# EAGLE board thermostat (EAGLE 7.6.0)
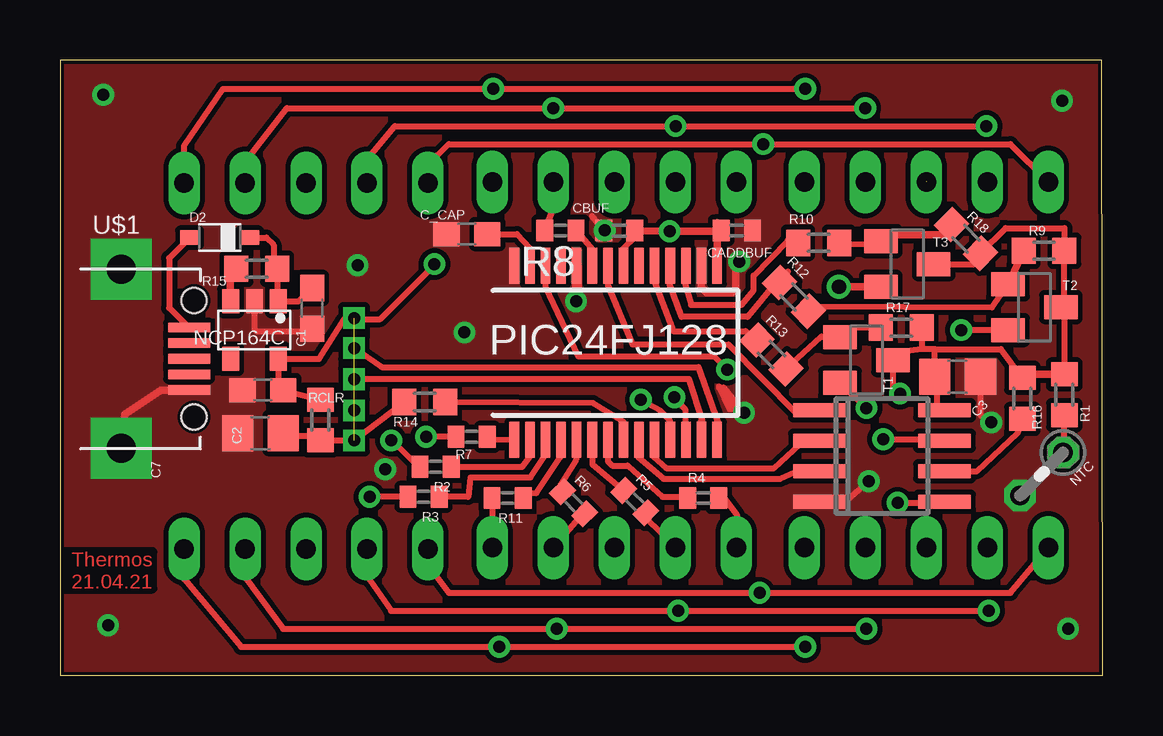
[diagram p0: board, top side]
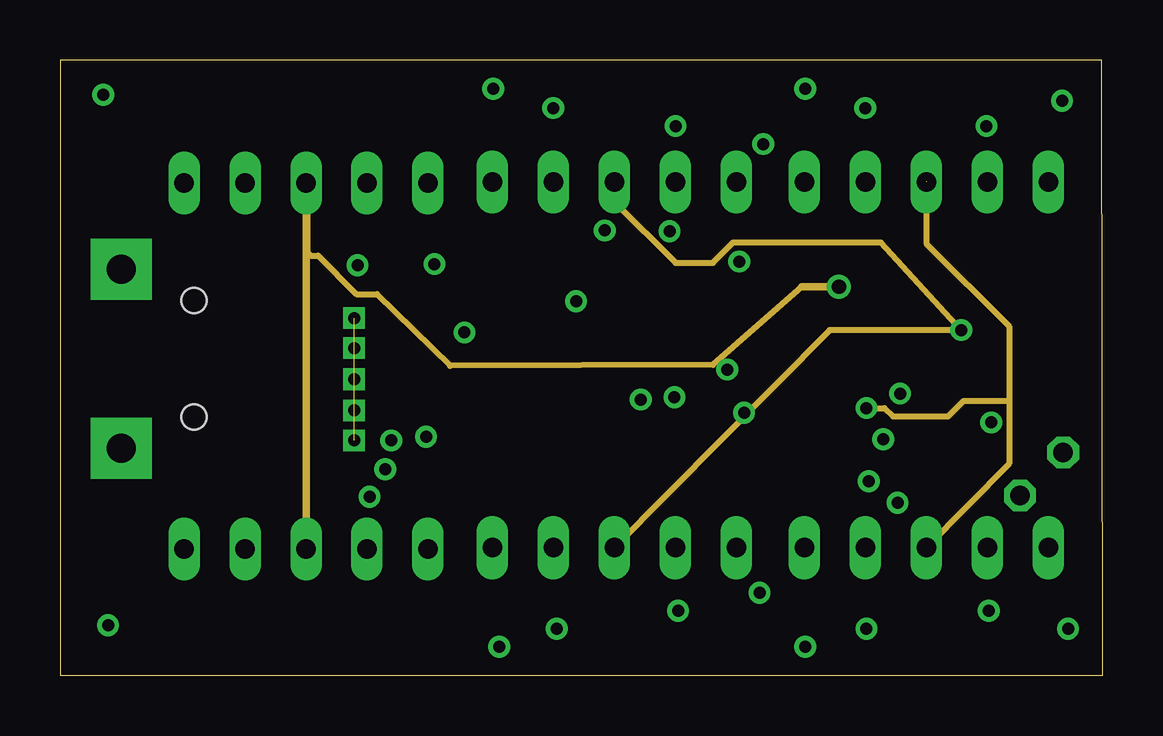
[diagram p1: board, inner layer Route2]
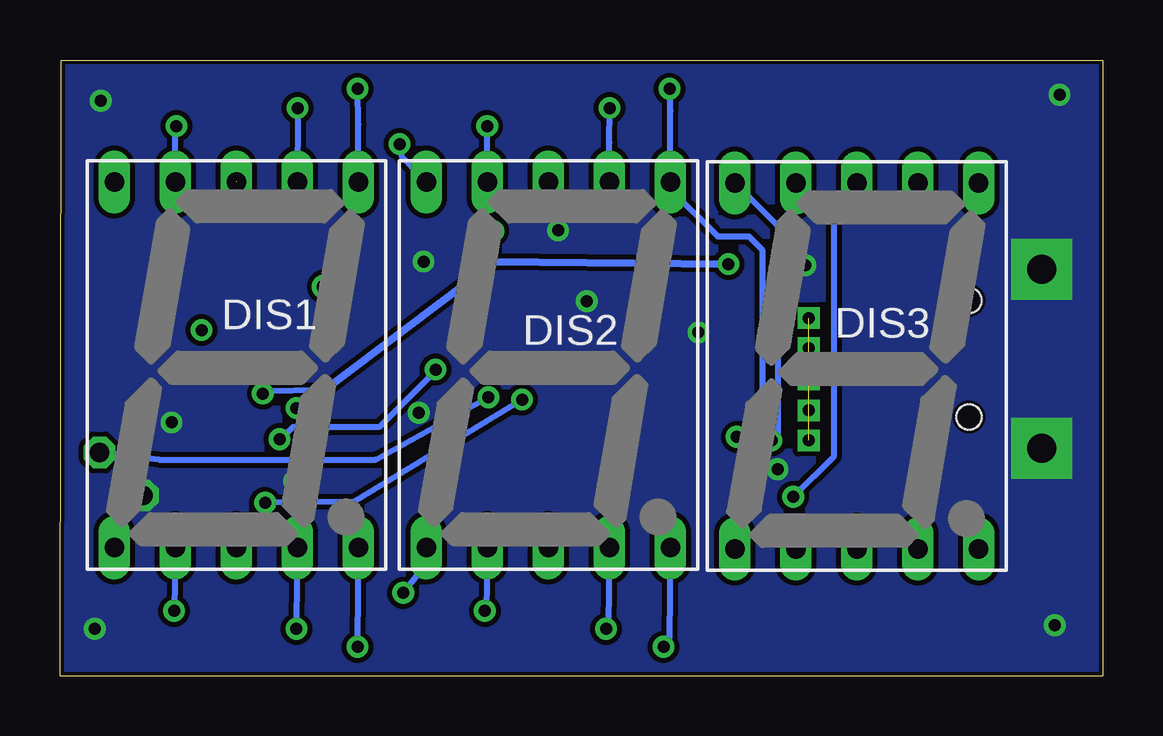
[diagram p2: board, bottom side, seen from below]

Size 43.45 x 25.65 mm. Coordinates in mm from the lower left corner, seen from the top.
Outline: 43.45,0 43.4,25.65 0,25.65 0,0 43.45,0
Copper layers (1+2*15+16): Top 0.035mm / dielectric 0.3mm / Route2 0.035mm / dielectric 0.3mm / Route15 0.035mm / dielectric 0.3mm / Bottom 0.035mm
Design rules "default *": minimum track width 10mil, minimum drill 24mil, track to track 8mil, track to pad 8mil, pad to pad 8mil, via to via 8mil, smd to smd 8mil, copper to edge 6mil, drill to drill 8mil, minimum pad ring 10mil, minimum via ring 8mil, stop-mask expansion 4mil, vias tented up to drill 0mil, thermal gap 10mil

## Footprints (pad centres in the part's own frame; a part is rotated, then mirrored left to right if it is on the bottom)
C0603 = smd 1.1 x 1: 1 -0.85,0; 2 0.85,0
C0805 = smd 1.3 x 1.5: 1 -0.95,0; 2 0.95,0
C0402 = smd 0.7 x 0.9: 1 -0.65,0; 2 0.65,0
SOD323_ST = smd 0.8 x 0.6: A 1.25,0; C -1.25,0
HDSP-M = drill 0.813 long: 1 -5.08,-7.62; 2 -2.54,-7.62; 3 0,-7.62; 4 2.54,-7.62; 5 5.08,-7.62; 6 5.08,7.62; 7 2.54,7.62; 8 0,7.62; 9 -2.54,7.62; 10 -5.08,7.62
TSOP-5 = smd 0.7 x 1: 1 -0.99,-1.2; 2 0,-1.2; 3 0.99,-1.2; 4 0.99,1.2; 5 -0.99,1.2
0204V = drill 0.813 octagon: 1 -1.27,0; 2 1.27,0
R0603 = smd 1 x 1.1: 1 -0.85,0; 2 0.85,0
R0402 = smd 0.7 x 0.9: 1 -0.65,0; 2 0.65,0
SOT23-BCE = smd 1 x 1.4: B -0.95,-1.1; C 0.95,-1.1; E 0,1.1
MICRO-USB = smd 0.4 x 1.75: 1 -1.3,4.525; 2 -0.65,4.525; 3 0,4.525; 4 0.65,4.525; 5 1.3,4.525 | drill 1.2 pad 2.54 square: GND1 -3.725,1.7; GND2 3.725,1.7 | hole 1.05: -2.425,4.73; 2.425,4.73
SSOP28 = smd 0.4 x 1.5: 1 -4.225,-3.625; 2 -3.575,-3.625; 3 -2.925,-3.625; 4 -2.275,-3.625; 5 -1.625,-3.625; 6 -0.975,-3.625; 7 -0.325,-3.625; 8 0.325,-3.625; 9 0.975,-3.625; 10 1.625,-3.625; 11 2.275,-3.625; 12 2.925,-3.625; 13 3.575,-3.625; 14 4.225,-3.625; 15 4.225,3.625; 16 3.575,3.625; 17 2.925,3.625; 18 2.275,3.625; 19 1.625,3.625; 20 0.975,3.625; 21 0.325,3.625; 22 -0.325,3.625; 23 -0.975,3.625; 24 -1.625,3.625; 25 -2.275,3.625; 26 -2.925,3.625; 27 -3.575,3.625; 28 -4.225,3.625
SO-08 = smd 0.6 x 2.2: 1 -1.905,-2.6; 2 -0.635,-2.6; 3 0.635,-2.6; 4 1.905,-2.6; 5 1.905,2.6; 6 0.635,2.6; 7 -0.635,2.6; 8 -1.905,2.6

## Placement (x,y rotation side)
C1  1u  [C0603]  10.5,15.3 270 top
C2  100n  [C0805]  8.35,10.1 180 top
C3  100n  [C0805]  37.4,12.45 180 top
C7  1u  [C0603]  8.45,11.9 180 top
C_CAP  100n  [C0603]  16.95,18.4 180 top
CADDBUF  100n  [C0402]  28.2,18.55 180 top
CBUF  100n  [C0402]  23.3,18.54 0 top
D2  BAT60J  [SOD323_ST]  6.65,18.25 180 top
DIS1  HD-H101  [HDSP-M]  36.1,12.95 0 bottom
DIS2  HD-H101  [HDSP-M]  23.1,12.95 0 bottom
DIS3  HD-H101  [HDSP-M]  10.25,12.9 0 bottom
NCP164C  -  [TSOP-5]  8.1,14.4 180 top
NTC  1k bei 25C  [0204V]  40.9,8.4 225 top
R1  1k  [R0603]  41.85,11.7 90 top
R2  47  [R0402]  15.65,8.7 180 top
R3  47  [R0402]  15.15,7.45 180 top
R4  47  [R0402]  26.8,7.4 0 top
R5  47  [R0402]  23.95,7.25 315 top
R6  47  [R0402]  21.4,7.2 315 top
R7  47  [R0402]  17.15,9.95 180 top
R8  47  [R0402]  20.85,18.55 180 top
R9  10k  [R0603]  41,17.7 0 top
R10  1k  [R0603]  31.61,18.03 0 top
R11  47  [R0402]  18.65,7.4 180 top
R12  1k  [R0603]  30.58,15.78 315 top
R13  1k  [R0603]  29.65,13.38 315 top
R14  100  [R0603]  15.2,11.4 0 top
R15  10k  [R0603]  8.2,16.95 0 top
R16  1k  [R0603]  40.1,11.55 90 top
R17  10k  [R0603]  35.05,14.5 0 top
R18  10k  [R0603]  37.75,18.2 315 top
RCLR  10k  [R0603]  10.85,10.65 90 top
T1  [SOT23-BCE]  33.6,13.15 270 top
T2  [SOT23-BCE]  40.6,15.35 270 top
T3  [SOT23-BCE]  35.3,17.15 270 top
U$1  MICRO-USB  [MICRO-USB]  0.85,13.2 270 top
U$2  -  [SSOP28]  23.15,13.45 0 top
U$3  MCP4141-103  [SO-08]  34.25,9.15 270 top

## Library data of the parts
C1 C7 C_CAP CADDBUF CBUF = eagle-ltspice; SPICEMODEL: NONE; SPICEPREFIX: C
C2 C3 R1 R9 R10 R12-R18 RCLR = rcl
D2 = diode
DIS1-DIS3 = display-hp; OC_FARNELL: unknown; OC_NEWARK: unknown
NCP164C = linear
NTC R2-R8 R11 = resistor
T1-T3 = transistor
U$1 = microusb
U$2 U$3 = microchip

## Nets
+3V3: C3.2 C7.1 CADDBUF.2 CBUF.2 NCP164C.5 R1.2 R9.2 R16.2 R17.2 R18.2 RCLR.2 T1.E T2.E T3.E U$2.15 U$2.21 U$3.8
+5V: C1.1 D2.C NCP164C.1 R15.2
_A: R8.1 U$2.23
_B: R7.1 U$2.1
_C: R6.1 U$2.5
_D: R5.1 U$2.6
_DP: R11.1 U$2.4
_E: R4.1 U$2.7
_F: R3.1 U$2.3
_G: R2.1 U$2.2
A: DIS1.7 DIS2.7 DIS3.7 R8.2
B: DIS1.6 DIS2.6 DIS3.6 R7.2
C: DIS1.4 DIS2.4 DIS3.4 R6.2
CS: U$2.22 U$3.1
D: DIS1.2 DIS2.2 DIS3.2 R5.2
DP: DIS1.5 DIS2.5 DIS3.5 R11.2
E: DIS1.1 DIS2.1 DIS3.1 R4.2
F: DIS1.9 DIS2.9 DIS3.9 R3.2
G: DIS1.10 DIS2.10 DIS3.10 R2.2
GND: C1.2 C2.2 C3.1 C7.2 C_CAP.2 CADDBUF.1 CBUF.1 NCP164C.2 NTC.2 U$1.5 U$1.GND1 U$1.GND2 U$2.16 U$2.24 U$2.28 U$3.4
IN1: U$2.11 U$3.5
IN2: NTC.1 R1.1 U$2.12
MCLR: C2.1 R14.1 RCLR.1
N$1: NCP164C.3 R15.1
N$3: R16.1 U$3.6
N$4: C_CAP.1 U$2.27
N$5: R13.2 R17.1 T1.B
N$6: D2.A U$1.1
N$8: R14.2 U$2.8
N$12: R10.2 R18.1 T3.B
N$14: R9.1 R12.2 T2.B
N$16: DIS1.3 DIS1.8 T1.C
N$17: DIS2.3 DIS2.8 T2.C
N$18: DIS3.3 DIS3.8 T3.C
PGC: U$2.13
PGD: U$2.14
S1: R13.1 U$2.19
S2: R12.1 U$2.18
S3: R10.1 U$2.17
SCK: U$2.10 U$3.2
SDI: U$2.9 U$3.3
SDO: U$2.26 U$3.7

## Tracks (layer width: path | path; a pad name or v marks a point on that pad's centre or on a via)
+3V3  (via drill 0.5)
  Top 0.254: CBUF.2 24.02,18.34 23.43,17.73 U$2.21 | v15.6,17.15 15.6,17.1 13.35,14.85 11.85,14.85 10.8,13.2 NCP164C.5 9.09,12.14 C7.1 RCLR.2 | 10.65,11.8 10.85,11.7 | 10.85,11.7 10.85,11.8 | 10.85,11.7 RCLR.2 | 10.8,11.7 RCLR.2 | U$3.8 37.8,11 | 36.55,10.95 36.55,11.85 C3.2 36.45,13.6 | 36.45,13.6 35.9,13.6 | R1.2 41.85,15.2 41.85,15.3 R9.2 41.85,18.65 39.4,18.65 R18.2 | R17.2 35.9,13.6 | T3.E 38.1,17.15 R18.2 | 36.45,13.6 39.2,13.6 R16.2 | 35.9,13.6 35.1,13.5 T1.E 34.7,12 v35,11.75
  Top 0.305: U$2.15 27.38,18.88 CADDBUF.2 | CBUF.2 v25.4,18.52 27.47,18.52 | R16.2 40.5,12.55 R1.2 | 41.85,15.3 T2.E 41.85,15.2 | 37.8,11 36.55,10.95 | R18.2
  Top 0.61: 27.47,18.52 CADDBUF.2
  Bottom 0.254: 32.45,11.9 35,11.85
  Bottom 0.305: v15.6,17.15 25.43,17.25 25.4,18.41 | 25.4,18.41 v25.4,18.52 | 25.4,18.41 25.4,17.2 32.45,11.9 | 35,11.85 v35,11.75
+5V
  Top 0.254: C1.1 9.95,15.6 NCP164C.1 9.05,15.74 R15.2 8.9,17.1 8.9,17.95 8.6,18.25 D2.C
_A
  Top 0.254: U$2.23 22.23,17.73 R8.1
_B
  Top 0.254: U$2.1 17.8,9.8 R7.1
_C
  Top 0.254: U$2.5 21.52,9.23 21.5,9 20.75,7.8 R6.1
_D
  Top 0.254: R5.1 22.19,8.79 U$2.6
_DP
  Top 0.254: R11.1 19.16,7.61 19.85,7.6 20.85,9.1 20.85,9.8 U$2.4
_E
  Top 0.254: R4.1 26.1,7.45 25.1,7.45 23.68,8.73 23.65,8.75 23,8.75 22.82,8.93 U$2.7
_F
  Top 0.254: U$2.3 20.25,9.8 20.25,9.25 19.6,8.25 17.1,8.25 17,7.45 R3.1 15.75,7.45
_G
  Top 0.254: R2.1 19.25,8.7 19.6,9.15 19.6,9.8 U$2.2
A  (via drill 0.5)
  Top 0.254: R8.2 20.55,19.43 DIS2.7 | DIS3.7 7.71,21.41 9.45,23.65 v20.55,23.65 v33.55,23.65
  Bottom 0.254: v33.55,23.65 33.55,23.46 DIS1.7 | DIS2.7 20.56,22.21 v20.55,23.65
B  (via drill 0.5)
  Top 0.254: R7.2 v15.25,9.95 | DIS3.6 5.17,22.07 6.8,24.45 v18.05,24.45 v31.05,24.45
  Bottom 0.254: DIS1.6 31.02,22.97 v31.05,24.45 | v18.05,24.45 18.02,23.52 DIS2.6 18.02,20.27 16.05,18.3 14.75,18.3 14.2,17.75 14.2,10.8 v15.25,9.95
C  (via drill 0.5)
  Top 0.254: R6.2 21.87,6.84 DIS2.4 | DIS3.4 7.71,4.09 9.3,1.95 v20.7,1.95 v33.6,1.95
  Bottom 0.254: DIS1.4 33.61,2.29 v33.6,1.95 | DIS2.4 20.61,2.04 v20.7,1.95
CS
  Top 0.254: U$2.22 22.82,16.27 23.85,13.8 27.66,13.8 27.86,13.8 30.65,10.95 31.59,11 U$3.1
D  (via drill 0.5)
  Top 0.254: DIS3.2 12.79,4.16 13.8,2.7 v25.75,2.7 v38.7,2.7 38.65,2.75 | R5.2 24.46,6.49 25.45,5.55 25.42,5.35 DIS2.2
  Bottom 0.254: DIS1.2 v38.69,2.69 v38.7,2.7 | 25.58,2.72 v25.75,2.7 25.69,2.61 DIS2.2
DP  (via drill 0.5)
  Top 0.254: R11.2 18.04,5.8 DIS2.5 | DIS3.5 5.17,4.03 7.55,1.2 v18.3,1.2 v31.05,1.2 31.3,1.4
  Bottom 0.254: DIS1.5 31.07,1.48 v31.05,1.2 | DIS2.5 18.07,1.53 v18.3,1.2
E  (via drill 0.5)
  Top 0.254: R4.2 27.66,7.44 28.2,6.7 28.21,6.25 DIS2.1 | DIS3.1 15.33,4.62 16.2,3.45 v29.15,3.45 39.6,3.45 DIS1.1
  Bottom 0.254: DIS2.1 28.18,4.67 v29.15,3.45
F  (via drill 0.5)
  Top 0.254: R3.2 v12.9,7.45 | DIS3.9 12.79,21.49 13.95,22.9 v25.65,22.9 v38.6,22.9 38.65,22.9
  Bottom 0.254: DIS1.9 38.64,22.89 v38.6,22.9 | DIS2.9 25.64,21.39 v25.65,22.9 | 13.05,7.3 v12.9,7.45 11.2,9.15 11.2,18.93 DIS3.9
G  (via drill 0.5)
  Top 0.254: DIS3.10 15.33,21.28 16.2,22.15 v29.3,22.15 39.6,22.15 DIS1.10 | v13.8,9.8 15.1,8.55 15.05,8.65 R2.2
  Bottom 0.254: DIS2.10 28.22,20.57 29.2,21.6 v29.3,22.15 | DIS3.10 13.55,18.75 13.55,10.05 v13.8,9.8
GND  (via drill 0.5)
  Top 0.254: NCP164C.2 8.1,14.45 8.2,14.35 10.4,14.35 C1.2 | CBUF.1 22.16,19.16 v22.7,18.55 | 27.45,12 27.45,12.05 27.9,11.1 28.05,11.1 27.65,12 v28.5,10.95 | C3.1 38.35,10.85 v38.8,10.55 | U$3.4 32.75,7.25 v33.7,8.1
  Top 0.305: U$1.5 4.2,11.9 2.7,10.9 U$1.GND2 | U$2.16 26.73,16.18 26.95,15.95 28,15.95 28.15,16.1 28.15,17.15 v28.3,17.25
  Top 0.406: U$2.24 21.52,15.77 v21.5,15.6
  other vias: 42,1.95 41.75,23.95 1.8,24.2 2,2.1 16.85,14.3 12.4,17.1 13.55,8.6
  pour Bottom (no thermals): 0.05,25.65 43.35,25.7 43.4,0 -0.05,0.05
  pour Top (no thermals): 0.05,25.65 43.35,25.7 43.4,0 -0.05,0.05
IN1  (via drill 0.5)
  Top 0.254: v34.9,7.2 37.1,7.2 37.59,7.15 U$3.5 | v24.2,11.5 25,11.05 25.4,10.65 25.45,9.85 U$2.11
  Bottom 0.254: v24.2,11.5 31.2,7.25 v34.9,7.2
IN2  (via drill 0.5)
  Top 0.254: R1.1 NTC.1 | v25.6,11.6 25.6,11.55 26.05,11.1 26.05,9.85 U$2.12
  Bottom 0.254: NTC.1 39.33,9 30.3,9 v25.6,11.6
MCLR
  Top 0.254: C2.1 9.3,10.35 9.7,10 10.75,10 RCLR.1 12.25,9.8 R14.1
N$1
  Top 0.305: R15.1 7.1,16.5 7.1,15.96 NCP164C.3
N$3
  Top 0.254: U$3.6 38.22,8.52 39.9,10.1 R16.1
N$4
  Top 0.254: 19.55,17.1 U$2.27 19.6,17.1 19.6,17.8 19.05,18.4 C_CAP.1
N$5
  Top 0.254: R17.1 31.95,14.45 | R13.2 31.73,14.13 T1.B
  Top 0.305: 31.95,14.45 T1.B
N$6
  Top 0.254: D2.A 4.55,17.4 4.55,15.33 U$1.1
N$7  (via drill 0.5)  (4 unrouted)
  Top 0.254: v12.25,12.35 26.2,12.35 26.75,10.6 26.75,9.65
  other vias: 12.25,13.65 12.25,11.05 12.25,14.9 12.25,9.8
N$8
  Top 0.254: U$2.8 23.48,10.58 22.2,11.35 R14.2
N$12
  Top 0.254: 34.61,18.36 T3.B | R10.2 32.48,17.98 34.25,18 T3.B | 34.8,18.4 T3.B
  Top 0.305: 34.61,18.36 36.91,18.36 R18.1
N$14
  Top 0.254: T2.B 38.83,15.33 31.48,15.38 R12.2
  Top 0.305: T2.B R9.1
N$16  (via drill 0.5)  (1 unrouted)
  Top 0.254: T1.C v33.6,11.15 | v33.6,11.15 33.6,11.35 | v33.6,11.15 33.85,11.2
  Route2 0.254: 36.1,20.6 36.1,18 39.55,14.55 39.55,11.5 | 39.55,11.5 39.55,8.83 DIS1.3 | v33.6,11.15 34.35,11.15 34.7,10.8 37,10.8 37.65,11.45 39.5,11.45 39.55,11.5
N$17  (via drill 0.5)
  Top 0.254: T2.C v37.55,14.4
  Route2 0.254: DIS2.8 23.1,19.75 25.65,17.2 27.2,17.2 28.05,18.05 34.2,18.05 v37.55,14.4 32.07,14.4 DIS2.3
N$18  (via drill 0.6)
  Top 0.305: T3.C v32.45,16.2
  Route2 0.254: 30.9,16.2 27.2,12.95 16.25,12.91 13.21,15.9 12.35,15.9 10.75,17.5 10.45,17.5 10.3,17.65 10.3,20.47
  Route2 0.305: v32.45,16.2 30.9,16.2 | 10.3,20.47 DIS3.8 DIS3.3
PGC
  Top 0.254: 26.7,10.55 26.74,10.05 | 26.74,10.05 26.75,9.85 | 26.74,10.05 26.7,10.05 26.7,10.6
  Top 0.305: 26.75,9.85 U$2.13
PGD
  Top 0.254: U$2.14 27.4,9.85 27.4,10.55 26.6,12.85 13.4,12.85 12.25,13.65
  Top 0.305: 27.35,9.85 U$2.14
S1
  Top 0.254: U$2.19 24.77,16.38 25.55,14.35 28.57,14.35 R13.1
S2
  Top 0.254: R12.1 30.33,16.83 29.9,16.55 30,16.6 28.65,14.95 25.9,14.95 25.4,16.3 25.4,17.05 U$2.18
S3
  Top 0.254: U$2.17 26.02,16.38 26.3,15.45 28.4,15.45 28.9,16.05 28.9,16.67 30.32,18.12 30.45,18.05 30.74,18.05 R10.1
SCK
  Top 0.254: U$2.10 24.73,9.12 25.25,8.65 29.75,8.65 30.85,9.65 32.44,9.65 U$3.2
SDI
  Top 0.254: U$2.9 24.07,9.12 25.15,8.2 30,8.2 30.8,8.55 32.39,8.55 U$3.3
SDO  (via drill 0.5)
  Top 0.254: U$2.26 20.23,16.23 21.6,13.3 27.25,13.3 v27.8,12.75 | 37.05,9.75 37.66,9.65 U$3.7 36.78,9.85 v34.3,9.85
  Bottom 0.254: v27.8,12.75 27.8,12.7 30.15,10.35 33.75,10.35 34.25,9.85 v34.3,9.85

## Text on the board
Top: Thermos / 21.04.21